# Altium PCB SolarNode.PcbDoc (part 1 of 2)
Units mil, origin at the board's own origin, x right, y up, seen from the top; angles counter-clockwise.
Board outline 7250 x 4975 mil, 2 copper layers (Top Layer, Bottom Layer); 206 components, 187 nets, 727 pads, 156 vias.
Unrouted connection lines stored in the file: 1.
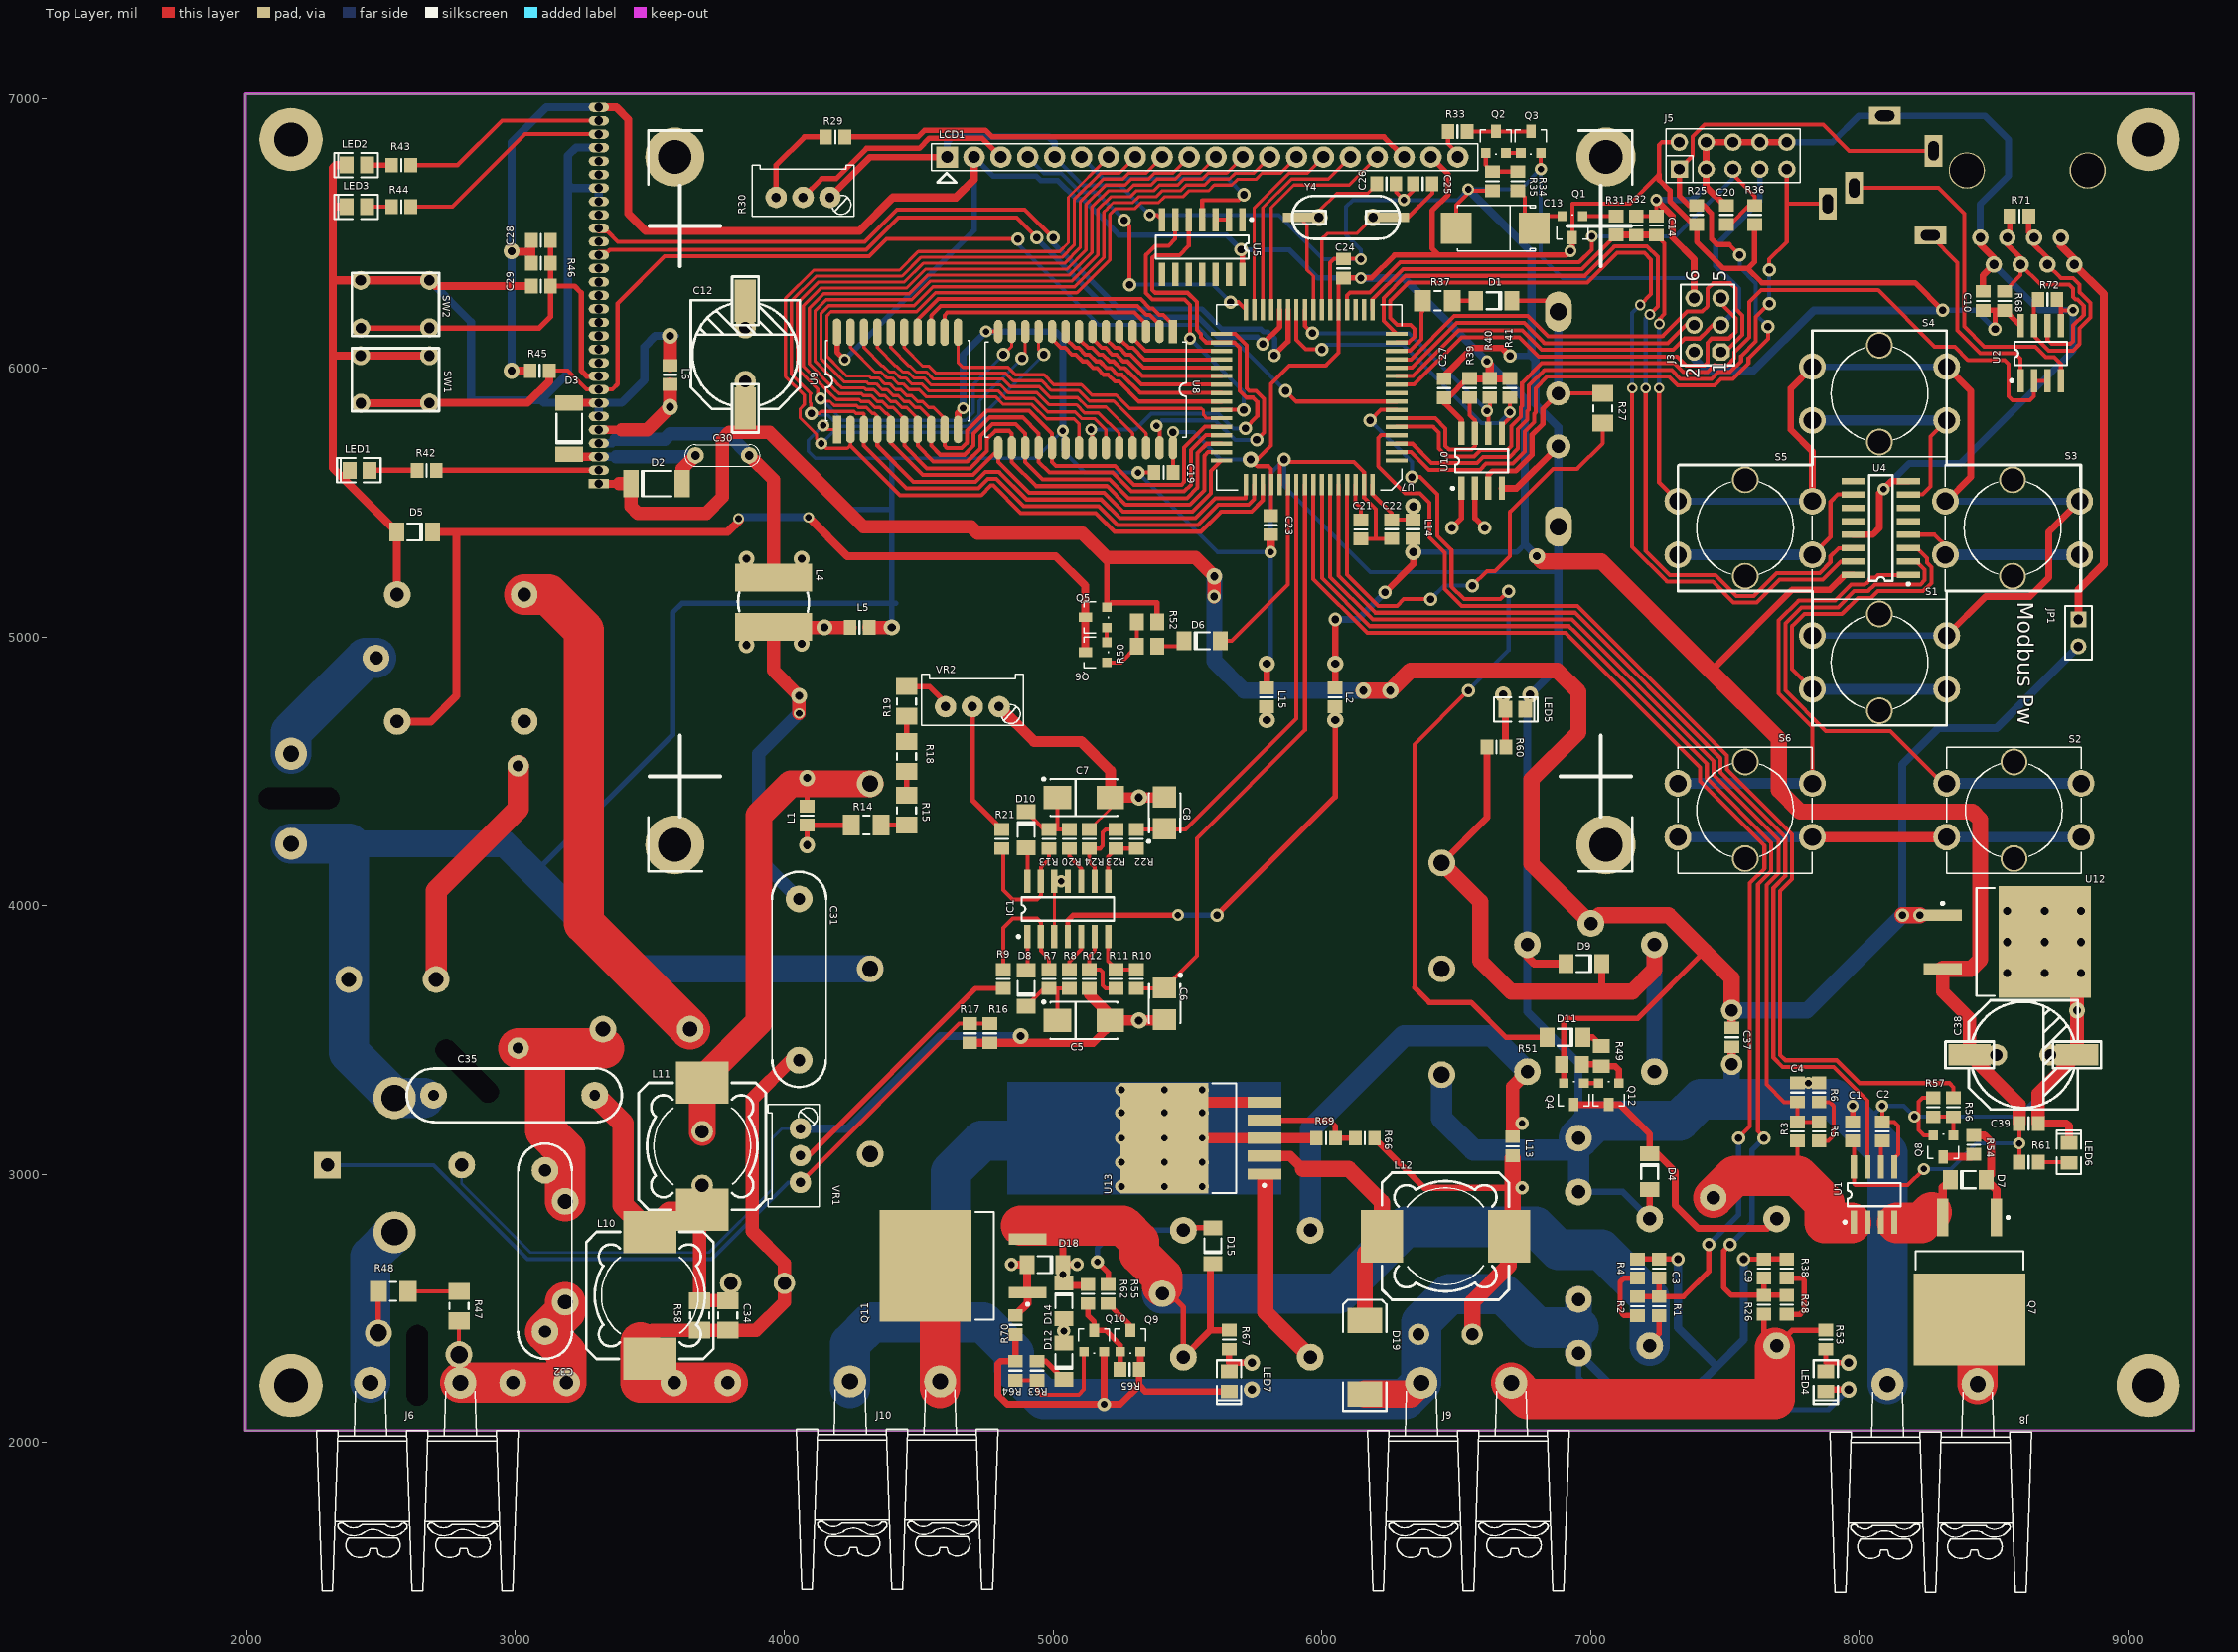
[diagram p0: Top Layer view]
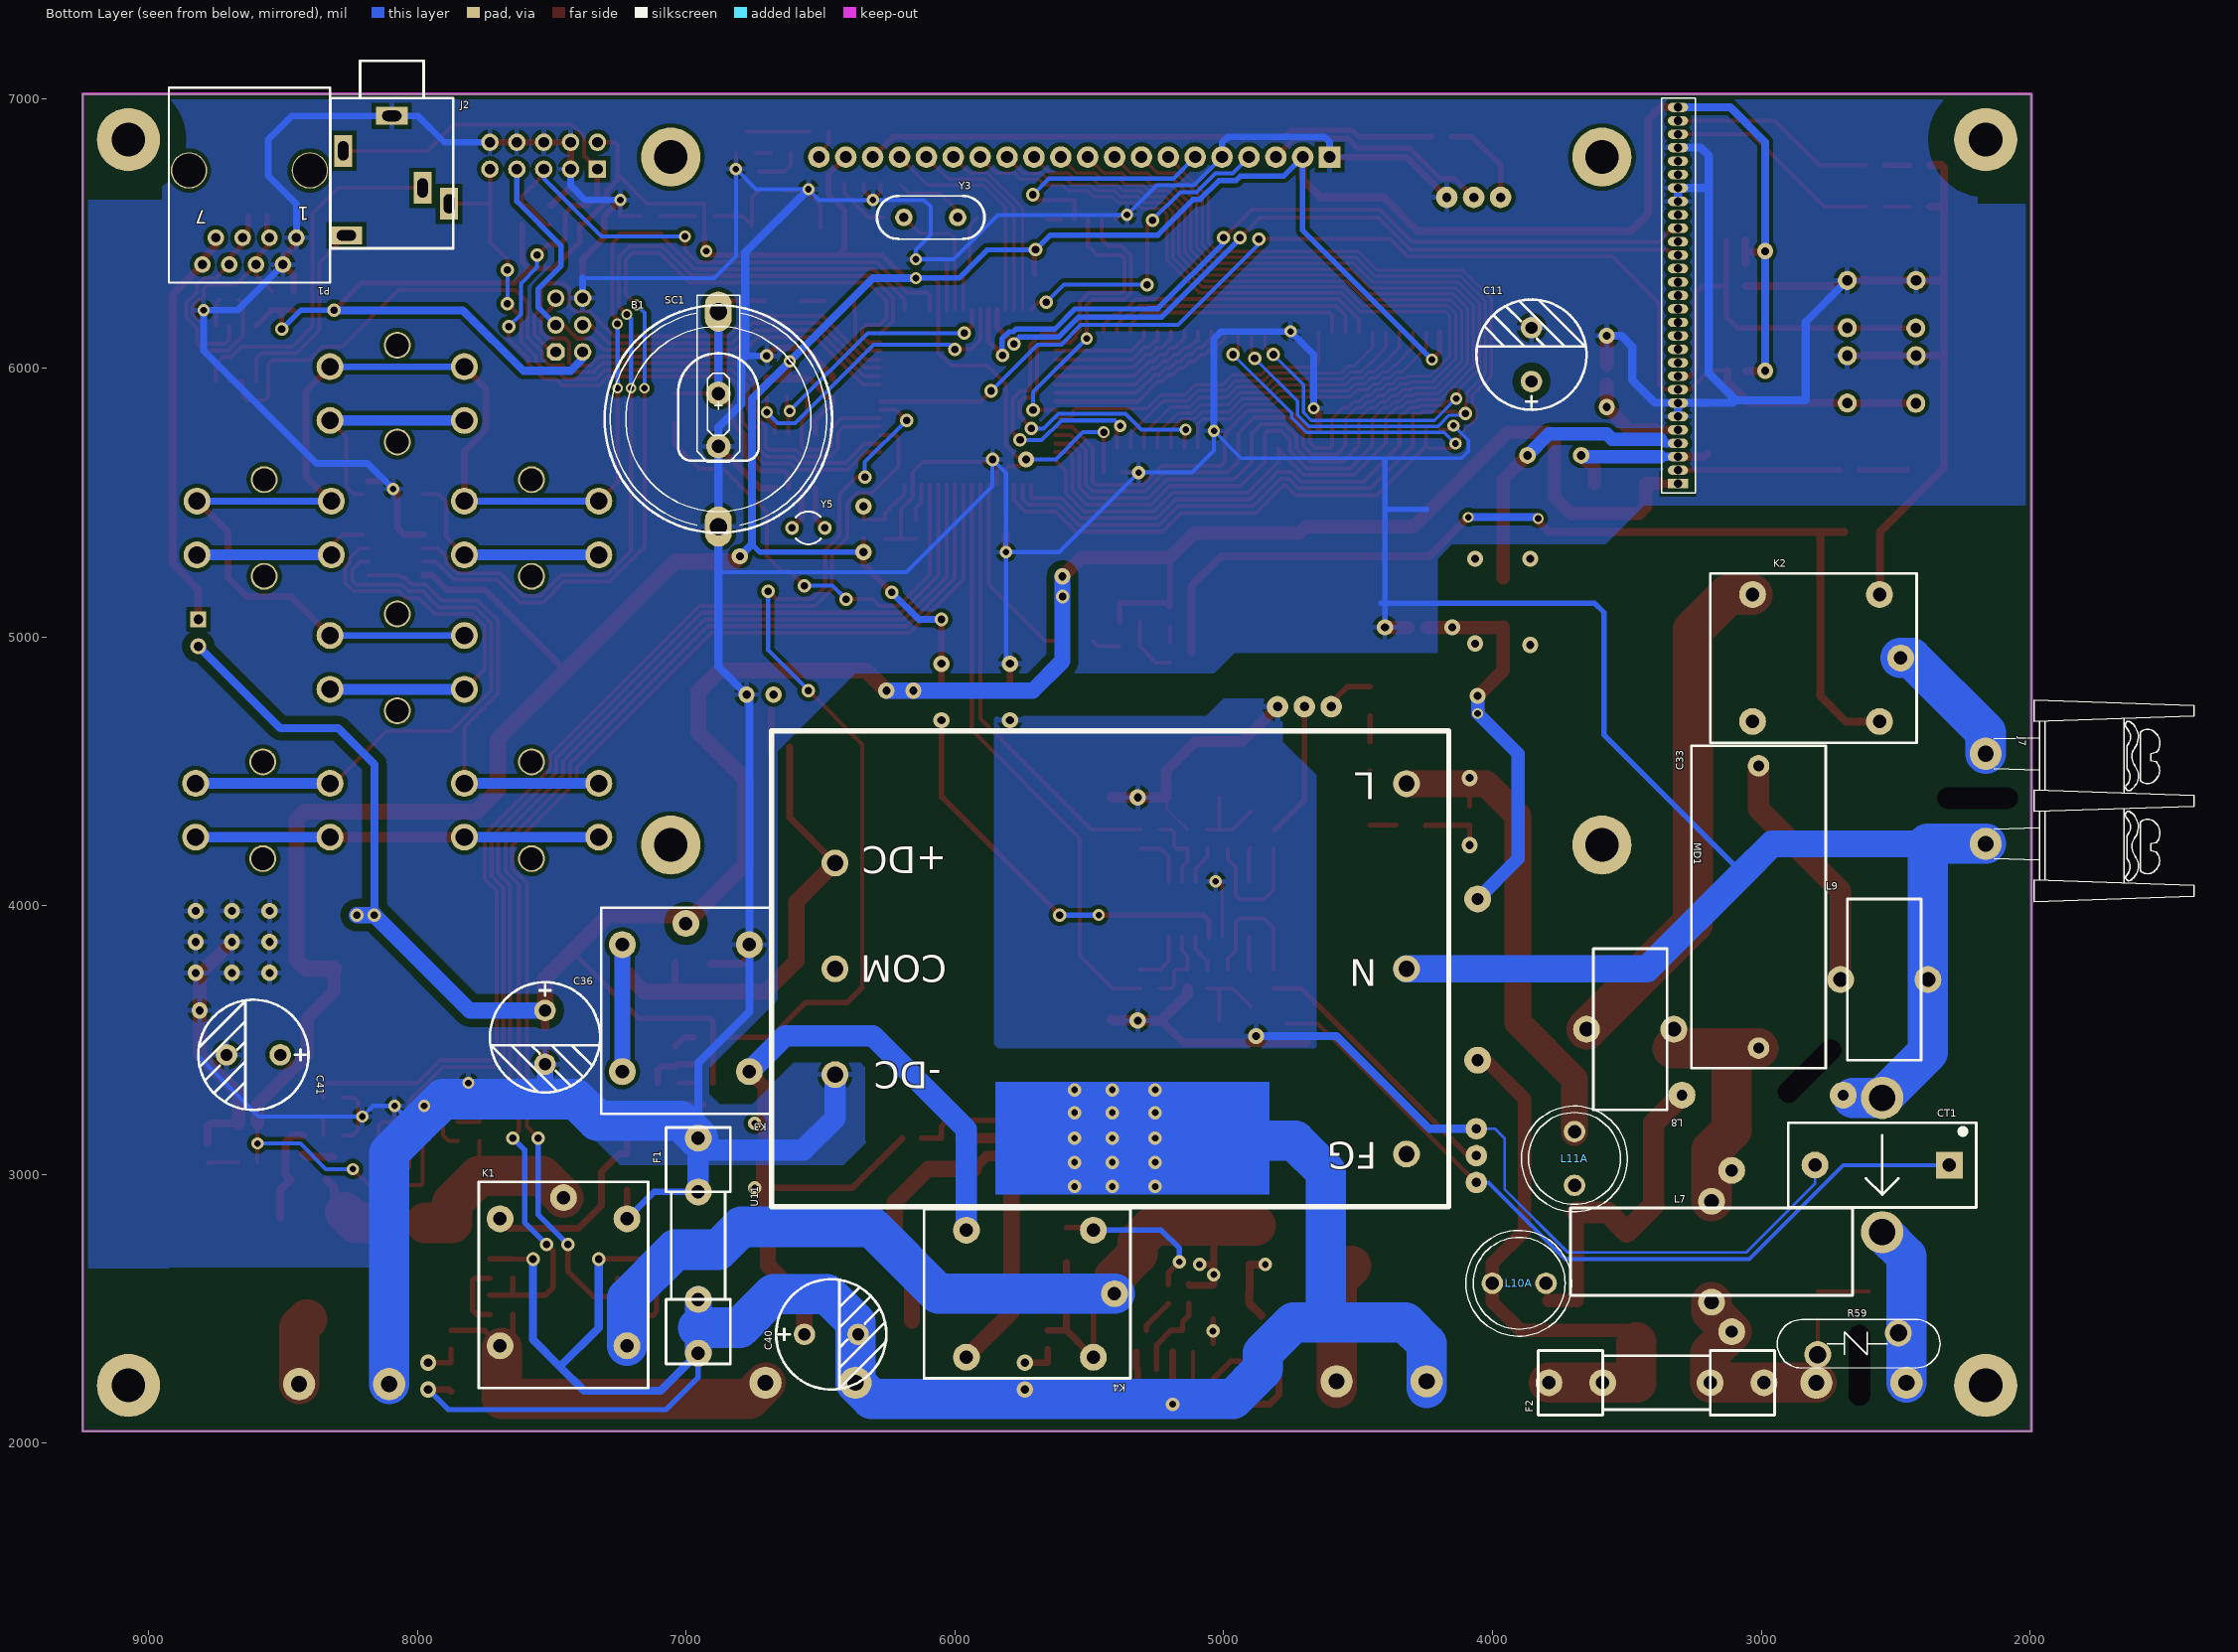
[diagram p1: Bottom Layer view, seen from below]

## Layer stack, top to bottom
Top Layer: signal copper 1.4
Dielectric: dielectric 12.6, FR-4, Dk 4.8
Bottom Layer: signal copper 1.4

## Board outline
1995,2045 9245,2045 9245,7020 1995,7020

## Design rules (kind name [scope] priority, off if disabled: settings)
Clearance padfree [InPolygon vs InNet('No Net') and IsPad] p1: gap=30
Clearance Pad-Pad [IsPad vs IsPad] p2: gap=1
Clearance "poly - net VA" [InNet('VA') vs InNet('GND')] p3: gap=30
Clearance "Poly - All" [InPolygon] p4: gap=15
Clearance Pad-Track [IsTrack vs IsPad] p5: gap=10
Clearance Genaral [All] p6: gap=10
ComponentClearance [All] p1 off: gap=10 collisioncheckmode=3 verticalgap=10 showdistances=FALSE
HoleSize [All] p1: absolutevalues=TRUE maxlimit=500 minlimit=1 maxpercent=80.000 minpercent=20.000
PolygonConnect [All] p1: connectstyle=Relief reliefconductorwidth=20 reliefentries=4 polygonreliefangle="90 Angle"
RoutingVias [All] p1: holewidth=25 width=40 viastyle="Through Hole" minholewidth=10 minwidth=30 maxholewidth=100 maxwidth=150
SilkscreenOverComponentPads [All] p1: minsilkscreentomaskgap=10
SolderMaskExpansion [All] p1: expansion=4
Width [All] p1: maxlimit=1000 minlimit=10 preferedwidth=15
25 further rules are at their usual default settings.

## Classes and differential pairs
component class U_PLmodule: C28 C29 C30 C31 D2 D3 L4 L5 L6 LED1 LED2 LED3 MD1 R42 R43 R44 R45 R46 R47 R48 SW1 SW2
component class U_ACmonitor: C1 C2 C3 C4 C5 C6 C7 C8 C9 CT1 D8 D10 IC1 J6 L1 L2 L15 R1 R2 R3 R4 R5 R6 R7 R8 R9 R10 R11 R12 R13 R14 R15 R16 R17 R18 R19 R20 R21 R22 R23 R24 R26 R28 R38 R59 U1 VR1 VR2
component class U_PSU: C11 C12 C32 C33 C34 C35 C36 C37 C38 C39 C40 C41 D9 D12 D14 D15 D18 D19 F2 J10 K3 K4 L7 L8 L9 L10 L10A L11 L11A L12 L13 LED5 LED6 LED7 Q9 Q10 Q11 R55 R58 R60 R61 R62 R63 R64 R65 R66 R67 R69 R70 U11 U12 U13
component class U_HUD: C13 C14 LCD1 Q1 Q2 Q3 R29 R30 R31 R32 R33 R34 R35 S1 S2 S3 S4 S5 S6 U4
component class U_Actuator: D4 D5 D6 D7 D11 F1 J7 J8 J9 K1 K2 LED4 Q4 Q5 Q6 Q7 Q8 Q12 R49 R50 R51 R52 R53 R54 R56 R57
component class U_Mcu: B1 C10 C19 C20 C21 C22 C23 C24 C25 C26 C27 D1 J2 J3 J5 JP1 L14 P1 R25 R27 R36 R37 R39 R40 R41 R68 R71 R72 SC1 U2 U5 U7 U8 U9 U10 Y3 Y4 Y5

## Components (designator, comment, footprint, x,y, rotation, side; value= is the part's Value field where it differs from the comment)
B1 "+3V" pincucao 6880,6210.36 r180 bottom
C1 "104" 6-0805_N 7975,3160 r90 top
C2 "102" 6-0805_N 8085,3160 r90 top
C3 "104" 6-0805_N 7255,2650 r90 top
C4 "104" 6-0805_N 7770,3305 r90 top
C5 "100u16V" TC6032-2412 5115,3572.64 r0 top
C6 "1u16V" TC3528-1411 5415,3635 r270 top
C7 "100u16V" TC6032-2412 5115,4402.64 r0 top
C8 "1u16V" TC3528-1411 5415,4345 r90 top
C9 "104" 6-0805_N 7645,2650 r90 top
C10 "104" 6-0805_N 8460,6250 r90 top
C11 "1000u25V" CAP40x20 3855,5950 r90 bottom (schematic designator C40)
C12 "330uF/35v" EEE-G 3855,6050 r270 top (schematic designator C38)
C13 "107" SMC_D/WA 6790,6520.36 r180 top
C14 "CAP" 6-0805_N 7245,6529.92 r90 top
C19 "104" 6-0805_N 5411.42,5611.25 r180 top
C20 "104" 6-0805_N 7505,6570 r90 top
C21 "104" 6-0805_N 6145,5400 r270 top
C22 "104" 6-0805_N 6260,5400.36 r90 top
C23 "104" 6-0805_N 5810,5415.36 r270 top
C24 "104" 6-0805_N 6080,6370.36 r90 top
C25 "22p" 6-0805_N 6375.43,6685.36 r0 top
C26 "22p" 6-0805_N 6240.43,6685.36 r180 top
C27 "104" 6-0805_N 6455,5925 r90 top
C28 "68p" 6-0805_N 3095,6475 r180 top
C29 "68p" 6-0805_N 3095,6305 r180 top
C30 "1uF metalized polyester" CSIP3 3670,5675 r0 top
C31 "0.033uF/300VAC" 100n400v#1 4055,3425 r90 top
C32 "0.1uF/300VAC" 100n400v#1 3110,3015 r270 top
C33 "1uF/300VAC" CAP1.2/0.5 3010,3470 r90 bottom
C34 "15nF" 3216[1206] 3790,2475 r90 top
C35 "470nF/300VAC" 100n400v#2 2695,3295 r0 top
C36 "1000u25V" CAP40x20 7525,3610 r270 bottom
C37 "104" 6-0805_N 7525,3510 r270 top
C38 "330uF/35v" EEE-G 8610,3445 r180 top
C39 "104" 6-0805_N 8630,3190 r0 top
C40 "1000u25V" CAP40x20 6560,2405 r180 bottom
C41 "1000u25V" CAP40x20 8510,3445 r0 bottom (schematic designator C40)
CT1 "AX0500" CT-NHO 2300,3035 r0 bottom
D1 "1N4148" SOD-80/MLL34 6640,6250.36 r0 top
D2 "FR207" MELF-D5022-2009 3525,5570 r180 top
D3 "FR207" MELF-D5022-2009 3200,5775 r270 top
D4 "1N4148" SOD-80/MLL34 7220,3010 r90 top
D5 "1N4148" SOD-80/MLL34 2625,5390 r0 top
D6 "Z9V" SOD-80/MLL34 5555,4985 r180 top
D7 "Z12V" SOD-80/MLL34 8405,2980 r180 top
D8 "1N4148" SOD-80/MLL34 4900,3692.64 r270 top
D9 "1N4148" SOD-80/MLL34 6975,3785 r0 top
D10 "1N4148" SOD-80/MLL34 4900,4282.64 r90 top
D11 "Z9V" SOD-80/MLL34 6905,3510 r0 top
D12 "1N4148" SOD-80/MLL34 5040,2305 r270 top
D14 "Z15V" SOD-80/MLL34 5040,2530 r90 top
D15 "1N4148" SOD-80/MLL34 5595,2735 r270 top
D18 "Z12V" SOD-80/MLL34 4970,2665 r0 top
D19 "SS24/34" DSO-C2/X3.3 6160,2320 r90 top
F1 "FUSE 15A" FUSE2 6955,2935 r270 bottom
F2 "FUSE 5A" FUSE2 3190,2225 r0 bottom
IC1 "LM324" SO14 5055,3987.64 r0 top
J2 "COM_PORT1_TTL" SJ-3515 8095,7005 r180 bottom
J3 "SPI EX" HDR2X3 7485,6060 r90 top
J5 "HEADER 5X2" IDC10 7330,6740 r0 top
J6 "220 VAC IN" JACKCAUDAU2 2460,2225 r0 top
J7 "600W AC/DC MODULE" JACKCAUDAU2 2165,4565 r270 bottom
J8 "95-150W 12/24VDC LED LAMP" JACKCAUDAU2 8440,2220 r180 top
J9 "600W VIN" JACKCAUDAU2 6370,2225 r0 top
J10 "JP2" JACKCAUDAU2 4245,2230 r0 top
JP1 "Modbus Pw" HDR1X2 8815,5065 r270 top
K1 "12V 10A" RELAYVUONG 7220,2835 r0 bottom
K2 "12V 10A" RELAYVUONG 2560,4685 r90 bottom
K3 "12V 10A" RELAYVUONG 6765,3855 r0 bottom
K4 "12V 10A" RELAYVUONG 5485,2320 r90 bottom
L1 "Choke" 6-0805_N 4085,4335 r270 top
L2 "Choke" 6-0805_N 6050,4775 r90 top
L4 "39uH" 6D28 3960,5220 r0 top
L5 "1mH" 6-0805_N 4280,5035 r0 top
L6 "680uH" 6-0805_N 3575,5975 r90 top
L7 "Inductor" IND26x8 3185,2525 r0 bottom
L8 "Inductor" IND15X7 3325,3540 r270 bottom
L9 "Inductor" IND15x7 2705,3725 r90 bottom
L10 "100uH 1A" IND1207 3500,2550 r180 top
L10A "100uH 1A" CAMTRONDUNG 4000,2595 r180 bottom
L11 "100uH 1A" IND1207 3695,3105 r180 top
L11A "100uH 1A" CAMTRONDUNG 3695,2960 r90 bottom
L12 "330uH" IND1207 6460,2770 r90 top
L13 "10uH" 6-0805_N 6710,3105 r90 top
L14 "10uH" 6-0805_N 6340,5400.36 r90 top
L15 "Choke" 6-0805_N 5795,4775 r90 top
LCD1 "ST7920" LCD12864B 5325,5505.36 r180 top
LED1 "TXON_LED" "SMD _LED" 2420,5620 r0 top
LED2 "PKD_LED" "SMD _LED" 2410,6755 r0 top
LED3 "BIU_LED" "SMD _LED" 2410,6600 r0 top
LED4 "VMAIN LED" "SMD _LED" 7875,2230 r90 top
LED5 "LED_MDL" "SMD _LED" 6720,4730 r180 top
LED6 "LED_PW" "SMD _LED" 8780,3080 r270 top
LED7 "LED_BAT" "SMD _LED" 5655,2230 r90 top
MD1 "PL3120 Module" ECHELONMODULE 3310,5570 r270 bottom
P1 "MODBUS" BU_TEL8H_AMP 8625,6385 r0 bottom
Q1 "2N3904" SOT-23 6970,6565.36 r180 top
Q2 "2N3904" SOT-23 6610,6800.36 r0 top
Q3 "2N3904" SOT-23 6740,6800.36 r0 top
Q4 "2N3906" SOT-23 6975,3340 r180 top
Q5 "2N3906" SOT-23 5200,5035 r90 top
Q6 "2N3906" SOT-23 5200,4905 r90 top
Q7 "MOSFET-P" TO254P1420-3_4M 8410,2600 r270 top
Q8 "2N2222" SOT-23 8350,3145 r180 top
Q9 "2N2222" SOT-23 5250,2340 r0 top
Q10 "2N2222" SOT-23 5115,2340 r0 top
Q11 "MOSFET-P" TO254P1420-3_4M 4665,2660 r180 top
Q12 "2N3906" SOT-23 7105,3340 r180 top
R1 "150k" 6-0805_N 7255,2510 r90 top
R2 "12k" 6-0805_N 7175,2510 r270 top
R3 "150k" 6-0805_N 7770,3160 r90 top
R4 "18k" 6-0805_N 7175,2650 r90 top
R5 "12k" 6-0805_N 7850,3160 r270 top
R6 "18k" 6-0805_N 7850,3305 r90 top
R7 "10k" 6-0805_N 4985,3727.64 r90 top
R8 "10k" 6-0805_N 5060,3727.64 r270 top
R9 "10k" 6-0805_N 4815,3727.64 r270 top
R10 "10k" 6-0805_N 5310,3727.64 r90 top
R11 "33k" 6-0805_N 5235,3727.64 r270 top
R12 "10k" 6-0805_N 5135,3727.64 r270 top
R13 "10k" 6-0805_N 4985,4247.64 r270 top
R14 "220k" 3216[1206] 4305,4300 r180 top
R15 "220k" 3216[1206] 4455,4355 r90 top
R16 "100R" 6-0805_N 4765,3525 r90 top
R17 "100R" 6-0805_N 4690,3525 r90 top
R18 "220k" 3216[1206] 4455,4555 r270 top
R19 "220k" 3216[1206] 4455,4760 r90 top
R20 "10k" 6-0805_N 5060,4247.64 r90 top
R21 "10k" 6-0805_N 4810,4247.64 r90 top
R22 "10k" 6-0805_N 5310,4247.64 r270 top
R23 "33k" 6-0805_N 5235,4247.64 r90 top
R24 "10k" 6-0805_N 5135,4247.64 r90 top
R25 "470" 6-0805_N 7395,6570 r90 top
R26 "150k" 6-0805_N 7645,2515 r90 top
R27 "10K" 3216[1206] 7045,5850 r90 top
R28 "12k" 6-0805_N 7730,2515 r270 top
R29 "1K" 6-0805_N 4190,6860 r0 top
R30 "10K" BTXANH 4170,6635 r180 top
R31 "2K2" 6-0805_N 7095,6530.36 r90 top
R32 "1K8" 6-0805_N 7170,6529.92 r270 top
R33 "1R0" 6-0805_N 6505,6880.36 r180 top
R34 "47K" 6-0805_N 6730,6695.36 r270 top
R35 "10K" 6-0805_N 6635,6695.36 r90 top
R36 "100k" 6-0805_N 7610,6570 r270 top
R37 "10K" 3216[1206] 6430,6250.36 r0 top
R38 "18k" 6-0805_N 7730,2650 r90 top
R39 "1K" 6-0805_N 6550,5925.36 r90 top
R40 "1K" 6-0805_N 6625,5925.36 r90 top
R41 "1K" 6-0805_N 6700,5925.36 r90 top
R42 "1k" 6-0805_N 2670,5620 r180 top
R43 "1k" 6-0805_N 2575,6755 r180 top
R44 "1k" 6-0805_N 2575,6600 r180 top
R45 "1k" 6-0805_N 3090,5990 r0 top
R46 "1k" 6-0805_N 3095,6390 r0 top
R47 "560K 1/4W" 3216[1206] 2790,2510 r270 top
R48 "560K 1/4W" 3216[1206] 2545,2565 r0 top
R49 "2k2" 2012[0805] 7040,3440 r270 top
R50 "2k2" 2012[0805] 5350,4965 r180 top
R51 "2k2" 2012[0805] 6930,3410 r180 top
R52 "2k2" 2012[0805] 5350,5055 r0 top
R53 "2K" 6-0805_N 7875,2385 r90 top
R54 "1K" 6-0805_N 8425,3110 r90 top
R55 "10" 6-0805_N 5205,2555 r90 top (schematic designator R67)
R56 "1K" 6-0805_N 8350,3250 r270 top
R57 "10K" 6-0805_N 8275,3250 r270 top
R58 "330" 3216[1206] 3685,2475 r270 top
R59 "MOV 14D471" MOV471 2790,2330 r180 bottom
R60 "2K" 6-0805_N 6650,4590 r180 top
R61 "2K" 6-0805_N 8630,3045 r180 top
R62 "10K" 6-0805_N 5130,2555 r90 top
R63 "1K" 6-0805_N 4940,2270 r90 top
R64 "10K" 6-0805_N 4860,2270 r270 top
R65 "10K" 6-0805_N 5285,2275 r180 top
R66 "5K6" 6-0805_N 6160.43,3135 r0 top
R67 "2K" 6-0805_N 5655,2385 r90 top
R68 "1K" 6-0805_N 8540,6250 r90 top
R69 "1K8" 6-0805_N 6015.43,3135 r180 top
R70 "1K" 6-0805_N 4860,2440 r90 top
R71 "300" 6-0805_N 8595,6565 r0 top
R72 "1K" 6-0805_N 8700,6255 r0 top
S1 "SW-PB" CTCHIP_TO 7825,4805 r90 top
S2 "SW-PB" CTCHIP_TO 8825,4455 r270 top
S3 "SW-PB" CTCHIP_TO 8320,5305 r90 top
S4 "SW-PB" CTCHIP_TO 7825,5805 r90 top
S5 "SW-PB" CTCHIP_TO 7325,5305 r90 top
S6 "SW-PB" CTCHIP_TO 7825,4455 r270 top
SC1 "1F 5.5V" SUPERCAP 6880,5905.36 r270 bottom
SW1 "SERVICE" SW-4P-S 2680,5870 r180 top
SW2 "RESET" SW-4P-S 2680,6150 r180 top
U1 "ACS712" SO8 8055,2925 r0 top
U2 "DS75176BN(8)" SO8 8675,6055 r0 top
U4 "4017" SO16 8080,5405 r90 top
U5 "74HC02" SO14 5555,6450 r180 top
U7 "ATmega128" QFP64-3 6278.42,5656.25 r180 top
U8 "CY62256" SO28X 5446.42,6136.25 r270 top
U9 "74HC573" SO20W 4196.42,5771.25 r90 top
U10 "DS1307" SO8 6595,5655.36 r0 top
U11 "ATC-12S" "ATC MODULE" 4320,3765 r0 bottom
U12 "78M05" TO254P1420-3_4M 8550,3865 r0 top
U13 "LM2576" TO170P1420-6N 5550,3135 r180 top
VR1 "10k" BTXANH 4060,3170 r270 top
VR2 "1K" BTXANH 4800,4740 r180 top
Y3 "14.7456MHz" XTAL 6190,6560.36 r180 bottom
Y4 "14.7456MHz" XTAL-SMD 6265,6560.36 r180 top
Y5 "32,768k" R38 6545,5405.36 r270 bottom

## Footprints (in the part's own frame and the unit in brackets; to place one, negate y for a bottom-side part, rotate by r counter-clockwise, add the part's x,y. Pads: shape width x height; smd on the part's side, far side on the other; paste and mask are expansions set on the pad)
6-0805_N [mm] "Chip Resistor, Body 2.0x1.2mm, IPC Medium Density"
  rect 1.2x1.4 smd: 1(-0.9,0) 2(0.9,0)
  silkscreen extent 0,-0.6 0,0.6, body extent -1.07,-0.7 1.07,0.7, height 0.7
6D28 [mm] "inductor 6D28"
  rect 7.3x2.65 smd: 1(0,0) 2(0,-4.65)
  silkscreen extent -3.35,-3.19 3.35,-1.38
100n400v#1 [mil]
  round 100 hole 45: 1(0,0) 2(600,0)
  silkscreen extent -99,-101 700,101
100n400v#2 [mil]
  round 100 hole 40: 1(0,0) 2(600,0)
  silkscreen extent -99,-101 700,101
2012[0805] [mm] "Metal Electrode Face (MELF) Resistor; Body 2 x 1.4 mm (LxDia)"
  rect 1.3x1.6 smd: 1(-0.95,0) 2(0.95,0)
3216[1206] [mm] "Metal Electrode Face (MELF) Resistor; Body 3.2 x 1.8 mm (LxDia)"
  rect 1.6x2 smd: 1(-1.4,0) 2(1.4,0)
  silkscreen extent -0.3,-0.9 0.3,0.9
"ATC MODULE" [mm] "AC - DC convert module"
  round 2.54 hole 1.524: 1(0,17.5) 2(0,0) 3(0,-17.5) 4(54,10) 5(54,0) 6(54,-10)
  silkscreen extent -4,-22.5 60,22.5
BTXANH [mil]
  round 80 hole 35: 1(0,0) 2(100,0) 3(200,0)
  silkscreen extent -90,-120 290,70
BU_TEL8H_AMP [mil]
  round 62 hole 35: 1(-175,-100) 2(-125,0) 3(-75,-100) 4(-25,0) 5(25,-100) 6(75,0) 7(125,-100) 8(175,0)
  round 135 hole 125: BO1(-225,-350) BO2(225,-350)
  silkscreen extent -300,-658 300,67
CAMTRONDUNG [mil]
  round 80 hole 50: 1(-0.63,0) 2(199.37,0)
  silkscreen extent -99,-197 294,197
CAP1.2/0.5 [mil]
  round 80 hole 40: 1(0,0) 2(1050,0)
  silkscreen extent -75,-250 1125,250
CAP40x20 [mil]
  round 80 hole 45: 1(0,0) 2(200,0)
  silkscreen extent -105,-205 305,205
CSIP3 [mil]
  round 62 hole 32: 1(0,0) 2(200,0)
  silkscreen extent -40,-40 240,40
CT-NHO [mm]
  rect 2.54x2.54 hole 1.27: 1(0,0)
  round 4 hole 2.5: 2(6.35,-6.35) 4(6.35,6.35)
  round 2.54 hole 1.27: 3(12.7,0)
  silkscreen extent -2.54,-4 15.24,4
CTCHIP_TO [mil]
  round 100 hole 85: 0(-80,-250) 0(280,-250)
  round 100 hole 65: 1(0,0) 1(0,-500) 2(200,0) 2(200,-500)
  silkscreen extent -135,-500 335,0
DSO-C2/X3.3 [mm] "DO-214-AB/SMC; 2 C-Bend Leads; Body 7.9 x 5.9 mm, inc. leads (LxW)"
  rect 2.4x3.3 smd: 1(-3.475,0) 2(3.475,0)
  silkscreen extent -5.07,-2.05 5.43,2.05
ECHELONMODULE [mil]
  rect 35x75 hole 32: 1(0,0)
  oval 35x75 hole 32: 2(-50,0) 3(-100,0) 4(-150,0) 5(-200,0) 6(-250,0) 7(-300,0) 8(-350,0) 9(-400,0) 10(-450,0) 11(-500,0) 12(-550,0) 13(-600,0) 14(-650,0) 15(-700,0) 16(-750,0) 17(-800,0) 18(-850,0) 19(-900,0) 20(-950,0) 21(-1000,0) 22(-1050,0) 23(-1100,0) 24(-1150,0) 25(-1200,0) 26(-1250,0) 27(-1300,0) 28(-1350,0) 29(-1400,0)
  silkscreen extent -1435,-60 35,65
EEE-G [mm] "aluminum Electrolytic Capacitor 10mm X 10mm"
  rect 4x2 smd: 1(5.08,0) 2(-5.08,0)
  silkscreen extent -7.37,-5.15 7.37,5.15
FUSE2 [mil]
  round 100 hole 50: 1(-200,0) 1(0,0) 2(400,0) 2(600,0)
  silkscreen extent -240,-120 640,120
HDR1X2 [mm] "Connector; Header; 2 Position"
  rect 1.5x1.5 hole 0.9: 1(0,0)
  round 1.5 hole 0.9: 2(2.54,0)
  silkscreen extent -1.27,-1.27 3.81,1.27
HDR2X3 [mil] "Connector; Header; 3x2 Position"
  oct 65x65 hole 40: 1(0,0)
  round 65 hole 40: 2(0,100) 3(100,0) 4(100,100) 5(200,0) 6(200,100)
  silkscreen extent -50,-50 250,150
IDC10 [mil]
  rect 65x65 hole 40: 1(0,0)
  round 65 hole 40: 2(0,100) 3(100,0) 4(100,100) 5(200,0) 6(200,100) 7(300,0) 8(300,100) 9(400,0) 10(400,100)
  silkscreen extent -50,-50 450,150
IND15X7 [mil]
  round 100 hole 55: 1(0,0) 2(0,-325)
  silkscreen extent -300,-300 300,-25
IND15x7 [mil]
  round 100 hole 55: 1(0,0) 2(0,-325)
  silkscreen extent -300,-300 300,-25
IND26x8 [mil]
  round 100 hole 55: 1(0,0) 2(0,-375)
  silkscreen extent -525,-350 525,-25
IND1207 [mm] "inductor 1207"
  rect 5x4 smd: 1(0,6) 2(0,-6)
  silkscreen extent -6,-6 6,6
JACKCAUDAU2 [mil]
  round 120 hole 60: 1(0,0) 2(335,0)
  silkscreen extent -200,-775 550,-30
LCD12864B [mil] "LCD 128x64"
  round 220 hole 125: 0(-1732.28,1279.53) 0(-1732.28,-1279.53) 0(1732.28,1279.53) 0(1732.28,-1279.53)
  rect 80x80 hole 45: 1(718.98,-1279.53)
  round 80 hole 45: 2(618.9,-1279.53) 3(518.9,-1279.53) 4(418.9,-1279.53) 5(318.9,-1279.53) 6(218.9,-1279.53) 7(118.9,-1279.53) 8(18.9,-1279.53) 9(-81.1,-1279.53) 10(-181.1,-1279.53) 11(-281.1,-1279.53) 12(-381.1,-1279.53) 13(-481.1,-1279.53) 14(-581.1,-1279.53) 15(-681.1,-1279.53) 16(-781.1,-1279.53) 17(-881.1,-1279.53) 18(-981.1,-1279.53) 19(-1081.1,-1279.53) 20(-1181.1,-1279.53)
  silkscreen extent -1831,-1378 1831,1378
MELF-D5022-2009 [mm] "Metal Electrode Face (MELF) Diode; Body 5 x 2.5 mm (LxDia)"
  rect 1.45x2.6 smd: 1(-2.425,0) 2(2.425,0)
  silkscreen extent -1.4,-1.2 1.4,1.2
MOV471 [mil]
  round 100 hole 65: 1(0,0) 2(300,80)
  silkscreen extent -150,-50 455,130
pincucao [mil]
  oval 100x150 hole 65: 1(0,0) 2(0,-800)
  silkscreen extent -403,-795 403,60
QFP64-3 [mil]
  rect 80x16 smd: 1(0,0) 2(0,-31) 3(0,-62) 4(0,-94) 5(0,-125) 6(0,-157) 7(0,-188) 8(0,-219) 9(0,-251) 10(0,-282) 11(0,-314) 12(0,-345) 13(0,-376) 14(0,-408) 15(0,-439) 16(0,-471) 33(652,-471) 34(652,-439) 35(652,-408) 36(652,-376) 37(652,-345) 38(652,-314) 39(652,-282) 40(652,-251) 41(652,-219) 42(652,-188) 43(652,-157) 44(652,-125) 45(652,-94) 46(652,-62) 47(652,-31) 48(652,0)
  rect 16x80 smd: 17(90,-561) 18(121,-561) 19(153,-561) 20(184,-561) 21(216,-561) 22(247,-561) 23(278,-561) 24(310,-561) 25(341,-561) 26(373,-561) 27(404,-561) 28(435,-561) 29(467,-561) 30(498,-561) 31(530,-561) 32(561,-561) 49(561,90) 50(530,90) 51(498,90) 52(467,90) 53(435,90) 54(404,90) 55(373,90) 56(341,90) 57(310,90) 58(278,90) 59(247,90) 60(216,90) 61(184,90) 62(153,90) 63(121,90) 64(90,90)
  silkscreen extent -20,-580 670,110
R38 [mm] "Crystal, Thru-Hole; 2 Leads; Body 3.1 x 8.2 mm (Dia.xH)"
  round 1.3 hole 0.7: 1(0,1.55) 2(0,-1.55)
  silkscreen extent -1.55,-1.19 1.55,1.17
RELAYVUONG [mm]
  round 2.54 hole 1.27: 1(6,-2) 2(0,12) 3(12,12) 4(12,0) 5(0,0)
  silkscreen extent -2,-3.5 14,16
SJ-3515 [mm] "3.5mm AUDIO JACK-STEREO"
  rect 3x1.7 hole 1 slot 1.8 at 0 deg: 1(0,-1.7) 5(-4.3,-13)
  rect 1.7x3 hole 1 slot 1.8 at 90 deg: 2(-4.6,-5) 3(2.9,-8.5) 4(5.4,-10)
  silkscreen extent -5.8,-14.21 5.8,3.5
SMC_D/WA [mil]
  rect 115x115 smd: 1(0,0) 2(290,0)
  silkscreen extent -5,-85 285,85
"SMD _LED" [mm]
  rect 1.3x1.6 smd: 1(0.95,0) 2(-0.95,0)
  silkscreen extent -2.13,-1.15 2,1.15
SO8 [mm] "Small Outline; 8 Leads; Body Width 3.9 mm; Pitch 1.27 mm"
  rect 0.6x2.2 smd: 1(-1.905,-2.6) 2(-0.635,-2.6) 3(0.635,-2.6) 4(1.905,-2.6) 5(1.905,2.6) 6(0.635,2.6) 7(-0.635,2.6) 8(-1.905,2.6)
  silkscreen extent -2.88,-2.72 2.5,1.1
SO14 [mm] "Small Outline; 14 Leads; Body Width 3.9 mm; Pitch 1.27 mm"
  rect 0.6x2.2 smd: 1(-3.81,-2.6) 2(-2.54,-2.6) 3(-1.27,-2.6) 4(0,-2.6) 5(1.27,-2.6) 6(2.54,-2.6) 7(3.81,-2.6) 8(3.81,2.6) 9(2.54,2.6) 10(1.27,2.6) 11(0,2.6) 12(-1.27,2.6) 13(-2.54,2.6) 14(-3.81,2.6)
  silkscreen extent -4.78,-2.72 4.38,1.1
SO16 [mm] "Small Outline; 16 Leads; Body Width 3.9 mm; Pitch 1.27 mm"
  rect 0.6x2.2 smd: 1(-4.445,-2.6) 2(-3.175,-2.6) 3(-1.905,-2.6) 4(-0.635,-2.6) 5(0.635,-2.6) 6(1.905,-2.6) 7(3.175,-2.6) 8(4.445,-2.6) 9(4.445,2.6) 10(3.175,2.6) 11(1.905,2.6) 12(0.635,2.6) 13(-0.635,2.6) 14(-1.905,2.6) 15(-3.175,2.6) 16(-4.445,2.6)
  silkscreen extent -5.42,-2.72 5,1.1
SO20W [mm]
  rect 2.6x0.8 smd: 1(0,0)
  oval 2.6x0.8 smd: 2(0,-1.27) 3(0,-2.54) 4(0,-3.81) 5(0,-5.08) 6(0,-6.35) 7(0,-7.62) 8(0,-8.89) 9(0,-10.16) 10(0,-11.43) 11(9.2,-11.43) 12(9.2,-10.16) 13(9.2,-8.89) 14(9.2,-7.62) 15(9.2,-6.35) 16(9.2,-5.08) 17(9.2,-3.81) 18(9.2,-2.54) 19(9.2,-1.27) 20(9.2,0)
  silkscreen extent 0.8,-12.51 8.4,1.09
SO28X [mm]
  rect 2.2x0.8 smd: 1(0,0)
  oval 2.2x0.8 smd: 2(0,-1.27) 3(0,-2.54) 4(0,-3.81) 5(0,-5.08) 6(0,-6.35) 7(0,-7.62) 8(0,-8.89) 9(0,-10.16) 10(0,-11.43) 11(0,-12.7) 12(0,-13.97) 13(0,-15.24) 14(0,-16.51) 15(11,-16.51) 16(11,-15.24) 17(11,-13.97) 18(11,-12.7) 19(11,-11.43) 20(11,-10.16) 21(11,-8.89) 22(11,-7.62) 23(11,-6.35) 24(11,-5.08) 25(11,-3.81) 26(11,-2.54) 27(11,-1.27) 28(11,0)
  silkscreen extent 0.99,-17.75 10.01,1.24
SOD-80/MLL34 [mm] "Metal Electrode Face (MELF) Diode; Body 3.5 x 1.7 mm (LxDia)"
  rect 1.4x1.8 smd: 1(-1.7,0) 2(1.7,0)
  silkscreen extent -0.7,-0.8 0.7,0.8
SOT-23 [mil]
  rect 36x36 smd: 1(0,0) 2(75,0)
  rect 36x50 smd: 3(38,80)
  silkscreen extent -20,-5 95,85
SUPERCAP [mil] "EECF5R5U155"
  round 90 hole 50: 1(0,0) 2(196.85,0)
  silkscreen extent -328,-423 518,423
SW-4P-S [mm]
  round 1.8 hole 1: 1(0,0) 2(0,-4.47) 3(6.502,-4.47) 4(6.477,0.025)
  silkscreen extent -0.91,-5.18 7.34,0.79, body extent -0.86,-5.23 7.35,0.76, height 9.52
TC3528-1411 [mm] "Capacitor, SM Tantalum; Body 3.5 x 2.8 mm (LxW typ)"
  rect 2x2.2 smd: 1(-1.5,0) 2(1.5,0)
  silkscreen extent -2.82,-1.5 1.85,1.63
TC6032-2412 [mm] "Capacitor, SM Tantalum; Body 6.0 x 3.2 mm (LxW typ)"
  rect 2.6x2.2 smd: 1(-2.5,0) 2(2.5,0)
  silkscreen extent -3.92,-1.75 3.15,1.87
TO170P1420-6N [mm] "D2-PAK, 6-Leads, Body 8.9x10.1mm, Pitch 1.7mm, Lead Span 14.2mm, IPC Medium Density"
  rect 3.2x1.05 smd: 1(-6,3.4) 2(-6,1.7) 3(-6,0) 4(-6,-1.7) 5(-6,-3.4)
  rect 8.3x10.45 smd: 6(3.45,0)
  silkscreen extent -6.13,-5.2 -1.1,5.2, body extent -3.35,-5.2 6.05,5.2, height 4.65
TO254P1420-3_4M [mm] "D2-PAK, 4-Leads, Body 9.2x10mm, Pitch 2.54mm, Lead Span 14.2mm, IPC Low Density"
  rect 3.6x1.1 smd: 1(-6.1,2.54) 3(-6.1,-2.54)
  rect 8.7x10.55 smd: 4(3.55,0)
  silkscreen extent -6.22,-5.1 -1.2,5.1, body extent -2.9,-5.13 6.45,5.13, height 4.57
XTAL [mil]
  round 65 hole 35: 1(0,0) 2(200,0)
  silkscreen extent -100,-80 300,80
XTAL-SMD [mil]
  rect 120x35 smd: 1(0,0) 2(350,0)
  silkscreen extent -25,-80 375,80

## Part data
B1 J6 J7 J8 J9: library part CON2, "Connector"
C1 C2 C3 C4 C9 C10 C13 C19 C21 C22 C23 C24 C27 C28 C29 C30 C31 C32 C33 C34 C35 C37 C39: library part CAP, "Capacitor"
C5 C6 C7 C8 C11 C36 C40 C41: library part "CAPACITOR POL", "Capacitor"
C12 C38 SC1: library part ELECTRO1, "Electrolytic Capacitor"
C14: "Capacitor"
C20: library part "Cap Pol1", "Polarized Capacitor (Radial)"
C25 C26: library part Cap, "Capacitor"
CT1: library part AX-0500
D1 D2 D3 LED1 LED2 LED3: library part DIODE
D4 D5 D8 D9 D10 D12 D15: library part "Diode 1N4007", "1 Amp General Purpose Rectifier"
D6 D7 D11 D14 D18: library part ZENER2, "Zener Diode"
D19: library part DIODE, "Hoangphat"
F1 F2: library part FUSE2, "Fuse"
IC1: "Op x 4"
J2: library part "Phonejack Stereo SW", "3-Conductor Jack with 2 break contacts (normals) and 2 auxiliary make contacts"
J3: library part "Header 3X2", "Header, 3-Pin, Dual row"
J10: library part Con2, "Connector 2"
JP1: library part "Header 2", "Header, 2-Pin"
K1 K2 K3 K4: library part Relay-SPDT, "G5LA-10A/250VAC / SRC-12VDC-SL-C"
L1 L2 L5 L10 L10A L11 L11A L14 L15: library part "INDUCTOR IRON"
L4 L6 L12 L13: library part INDUCTOR
LCD1: "ST7920 LCD128X64"
LED4 LED5 LED6 LED7: library part LED3, "Typical BLUE SiC LED"
MD1: library part CON29, "Connector"
P1: library part "Header 8", "Header, 8-Pin"
Q1 Q2 Q3 Q8 Q9 Q10: library part NPN1, "NPN Transistor"
Q4 Q5 Q6 Q12: library part PNP1, "PNP Transistor"
Q7 Q11: "P-Channel MOSFET"
R1 R2 R3 R4 R5 R6 R25 R26 R27 R28 R29 R33 R34 R35 R36 R37 R38 R39 R40 R41 R49 R50 R51 R52 R53 R54 R55 R56 R57 R58 R60 R61 R62 R63 R64 R65 R67 R68 R70 R71 R72: library part "Res Semi", "Semiconductor Resistor"
R7 R8 R9 R10 R11 R12 R13 R14 R15 R16 R17 R18 R19 R20 R21 R22 R23 R24: library part RES2
R30 VR1 VR2: library part RPot, "Potentiometer"
R31 R32 R42 R43 R44 R45 R46 R47 R48 R66 R69: library part RES1
R59: library part MOV
SW1 SW2: library part SW4-1, "Switch button 4 pin"
U2: "Multipoint RS-485/RS-422 Transceivers"
U5: library part 74LS02
U7: library part ATmega64-16AC, "8-Bit AVR Microcontroller with 64K Bytes of In-System Programmable Flash Memory"
U11: library part Component_1
U12: library part MC7805T
Y3 Y4: library part XTAL, "Crystal Oscillator"
Y5: library part CRYSTAL, "Crystal"

## Free pads (board coordinates)
  round 235 hole 125: 0(2165,2215) 0(2165,6850) 0(9075,2215) 0(9075,6850)
  round 10 hole 80 slot 300 at 0 deg: 0(2195,4400)
  round 10 hole 80 slot 300 at 90 deg: 0(2635,2290)
  round 10 hole 80 slot 300 at 135 deg: 0(2820,3385)
  round 365 on Top Overlay: 0(7575,5405) 0(8075,4905) 0(8075,5905) 0(8575,5405)

## Via types
v1: diameter 50, hole 28, Top Layer to Bottom Layer, 46 vias
v2: diameter 60, hole 30, Top Layer to Bottom Layer, 35 vias
v3: diameter 45, hole 25, Top Layer to Bottom Layer, 29 vias
v4: diameter 50, hole 25, Top Layer to Bottom Layer, 24 vias
v5: diameter 40, hole 25, Top Layer to Bottom Layer, 9 vias
v6: diameter 60, hole 32, Top Layer to Bottom Layer, 8 vias
v7: diameter 45, hole 24, Top Layer to Bottom Layer, 4 vias
v8: diameter 45, hole 28, Top Layer to Bottom Layer, 1 vias

## Nets (pads, with @x,y where several pads share a name; then routed paths per layer and width w, separated by ;. In a path a pad name is that pad's centre, name@x,y a point inside that pad or via, vN(x,y) a via of type N, cw(c..) or ccw(c..) an arc to the next point about the centre after c; other vN are vias at no path point)
12VDC_OUT: D9.2 K3.3 K3.4 R60.2 U11.6 | length 2325
  Top Layer w25: U11.6@6445.98,4158.7 6614.57,4327.28 R60.2@6614.57,4590 ; D9.2@7041.93,3785 7041.93,3683.07 7045,3680
  Top Layer w60: U11.6@6445.98,4158.7 6590,4014.69 6590,3795 6705,3680 7045,3680 7155,3680 7237.44,3762.44 K3.4@7237.44,3855
  Bottom Layer w60: K3.3@7237.44,3382.56 K3.4@7237.44,3855
+12: C40.1 L12.2 L13.1 R66.2 | length 1342.9
  Top Layer w25: R66.2@6195.87,3135 6380.87,2950 6710,2950 v4(6745,2950)
  Top Layer w60: C40.1@6560,2405 6560,2525 6696.22,2661.22 L12.2@6696.22,2770 6710,2783.78 6710,2950 L13.1@6710,3060
+LAMP_OUT: D7.2 Q7.3 U1.3 U1.4 | length 298.3
  Top Layer w30: Q7.3@8310,2840.16 8310,2951.93 D7.2@8338.07,2980
  Top Layer w150: U1.4@8140,2820 8230,2820 8270.16,2860.16
+VLAMP: K1.1 R3.1 U1.1 U1.2 | length 793.4
  Top Layer w15: 7770,2995 R3.1@7770,3124.57
  Top Layer w150: K1.1@7456.22,2913.74 7537.48,2995 7770,2995 7870,2895 7870,2820 U1.1@7970,2820
A: P1.3 P1.4 R68.2 R71.1 U2.6 | length 951.1
  Top Layer w15: R68.2@8540,6285.43 8600,6345.43 P1.4@8600,6385 8675,6310 8780,6310 8795,6295 8795,6265 8805,6255 8811.57,6255 8835,6231.57 8835,6198.43 8795,6158.43 8795,6100 8785,6090 8715,6090 8700,6105 U2.6@8700,6157.36
  Top Layer w20: R71.1@8559.57,6565 8559.57,6494.57 P1.3@8550,6485 8550,6460 8600,6410 P1.4@8600,6385
"AC SWITCHER": D6.1 U7.54 | length 711.1
  Top Layer w15: D6.1@5621.93,4985 5665,4985 5874.42,5194.42 U7.54@5874.42,5566.25
ADC_BAT_LAMP: C3.1 R1.2 R2.1 U7.57 | length 4513.3
  Top Layer w15: U7.57@5968.42,5566.25 5968.42,5215.16 6168.58,5015 6907.5,5015 7407.5,4515 7407.5,4462.5 7646.79,4223.21 7646.79,4138.21 7592.68,4084.1 7592.68,3177.68 v1(7550,3135)
  Top Layer w20: R2.1@7175,2545.43 R1.2@7255,2545.43 ; C3.1@7255,2614.57 R1.2@7255,2545.43 ; v1(7440,2740) 7440,2640 7345.43,2545.43 R1.2@7255,2545.43
  Bottom Layer w20: v1(7440,2740) 7550,2850 v1(7550,3135)
ADC_CELL: R27.1 U7.61 | length 1756.3
  Top Layer w15: U7.61@6094.42,5566.25 6094.42,5230.58 6210,5115 6280,5115 6305,5140 v1(6405,5140) ; v1(6560,5190) 6615,5245 6645,5245 6700,5300 6700,5465 6860,5625 6950,5625 7045,5720 R27.1@7045,5794.88
  Bottom Layer w15: v1(6405,5140) 6455,5190 v1(6560,5190)
ADC_IAC: C6.1 R10.1 U7.56 | length 2194.4
  Top Layer w15: R10.1@5310,3692.2 5413.15,3692.2 C6.1@5415,3694.06 5535,3814.06 5535,4250 5937.42,4652.42 U7.56@5937.42,5566.25
ADC_ILAMP: U1.7 U7.60 | length 3936.4
  Top Layer w15: U7.60@6062.42,5566.25 6062.42,5227.22 6199.64,5090 6941.07,5090 7482.5,4548.57 7482.5,4496.69 7724.29,4254.9 7724.29,4109.64 7680,4065.36 7680,3434.64 7714.64,3400 7905,3400 8030,3275 U1.7@8030,3027.36
ADC_MAIN: C9.1 R26.2 R28.1 U7.58 | length 4516
  Top Layer w15: U7.58@6000.42,5566.25 6000.42,5218.51 6178.93,5040 6920.36,5040 6940.18,5020.18 7432.5,4527.86 7432.5,4472.86 7671.79,4233.57 7671.79,4127.86 7622.68,4078.74 7622.68,3162.32 7645,3140 v1(7645,3135)
  Top Layer w20: v1(7520,2740) 7495,2715 7495,2580 7524.57,2550.43 R26.2@7645,2550.43 ; C9.1@7645,2614.57 R26.2@7645,2550.43 ; R28.1@7730,2550.43 R26.2@7645,2550.43
  Bottom Layer w20: v1(7520,2740) 7600,2820 7600,3090 v1(7645,3135)
ADC_VAC: C8.1 R22.1 U7.55 | length 1637.1
  Top Layer w15: R22.1@5310,4283.07 5493.07,4283.07 5905.42,4695.42 U7.55@5905.42,5566.25
ADC_VLAMP: C4.1 R3.2 R5.1 U7.59 | length 3671
  Top Layer w15: U7.59@6031.42,5566.25 6031.42,5222.87 6189.29,5065 6930.71,5065 7457.5,4538.21 7457.5,4486.33 7699.29,4244.54 7699.29,4120 7655,4075.71 7655,3335 7720.43,3269.57 C4.1@7770,3269.57 R3.2@7770,3195.43 R5.1@7850,3195.43
AGND: C5.2 C6.2 C7.2 C8.2 CT1.3 IC1.3 IC1.11 IC1.12 L15.1 R12.2 R16.1 R17.1 R24.2 VR1.1 VR2.1 | length 4801.1
  Top Layer w10: IC1.3@5005,3885.28 IC1.12@5005,4090 v7(5030,4090) IC1.11@5055,4090 ; R24.2@5135,4283.07 5213.43,4361.5 C7.2@5213.43,4402.64
  Top Layer w30: R17.1@4690,3489.57 R16.1@4765,3489.57 5149.29,3489.57 C5.2@5232.36,3572.64
  Top Layer w40: VR2.1@4800,4740 4930,4610 5105,4610 5213.43,4501.57 C7.2@5213.43,4402.64 5413.58,4402.64 C8.2@5415,4404.06 ; R12.2@5135,3692.2 5135,3670 5232.36,3572.64 5411.69,3572.64 C6.2@5415,3575.94
  Bottom Layer w10: CT1.3@2800,3035 2800,2965 3055,2710 3720,2710 3955,2945 3955,3135 3990,3170 VR1.1@4020,3170
  Bottom Layer w30: VR1.1@4060,3170 4235,3170 4580,3515 v2(4880,3515)
  other v2: 5320,3572.64 5320,4402.64 5795,4690
B: P1.5 P1.6 R71.2 R72.1 U2.7 | length 957.6
  Top Layer w15: R72.1@8664.57,6255 8650,6240.43 U2.7@8650,6157.36 8650,6119.64 8704.64,6065 8795.36,6065 8820,6089.64 8820,6148.08 8860,6188.08 8860,6241.92 8820,6281.92 8820,6310 8795,6335 8750,6335 P1.6@8700,6385
  Top Layer w20: R71.2@8630.43,6565 8630.43,6504.57 P1.5@8650,6485 8650,6460 8700,6410 P1.6@8700,6385
BACKLIGHT: C13.1 Q1.2 R34.2 | length 294.4
  Top Layer w15: R34.2@6730,6659.92 6755,6634.92 6755,6530.36 6790,6565.36 Q1.2@6895,6565.36
BAT_LAMP: D14.2 D15.2 D18.2 K1.2 K4.1 K4.5 Q11.3 R1.1 R62.2 R67.2 | length 4128.8
  Top Layer w20: K4.1@5406.26,2583.74 5485,2505 K4.5@5485,2320 ; K1.2@7210,2362.56 7255,2407.56 R1.1@7255,2474.57
  Top Layer w25: 5036.93,2808.07 D18.2@5036.93,2665 ; v4(5090,2665) D18.2@5036.93,2665 ; R62.2@5130,2590.43 5126.5,2586.93 5040,2586.93 5036.93,2590 v4(5036.93,2627.5) D18.2@5036.93,2665 ; K4.5@5485,2320 5585,2420 ; D15.2@5585,2673.07 5585,2668.07 5585,2420 ; R67.2@5654.57,2420 5585,2420
  Top Layer w150: 4880,2810 5260,2810 5320,2750 5320,2705 5406.26,2618.74 K4.1@5406.26,2583.74
  Bottom Layer w150: K4.1@5406.26,2556.22 6061.22,2556.22 6310,2805 6795,2805 6880,2720 7040,2720 7220,2540 K1.2@7220,2362.56
BATTERY: K3.2 K4.3 L13.2 | length 1636.7
  Top Layer w50: L13.2@6710,3150 6710,3327.56 K3.2@6765,3382.56
  Bottom Layer w80: K4.3@5957.44,2792.44 5957.44,3167.44 6305,3515 6632.56,3515 K3.2@6765,3382.56
  other v4: 6745,3190
BATTERY24V_IN: J10.2 Q11.4 | length 477.7
  Top Layer w150: Q11.4@4525.24,2660 4580,2605.24 J10.2@4580,2205
BIU: MD1.27 R44.1 | length 811.4
  Top Layer w15: R44.1@2610.43,6600 2765,6600 3035,6870 MD1.27@3310,6870
BTGND: C3.2 C9.2 C40.2 D19.1 F1.2 J9.1 J10.1 LED4.2 LED7.2 Q9.2 Q10.2 R4.2 R38.2 R64.1 R65.1 R69.2 R70.1 U13.3 U13.5 U13.6 | length 10493.6
  Top Layer w20: R4.2@7175,2685.43 C3.2@7255,2685.43 7324.57,2685.43 v1(7325,2685) ; v1(7570,2685) 7644.57,2685 C9.2@7645,2685.43 R38.2@7730,2685.43
  Top Layer w25: R70.1@4860,2404.57 R64.1@4860,2305.43 4805.43,2305.43 4795,2295 4795,2180 4830,2145 v4(5190,2145) ; Q10.2@5190,2340 v4(5190,2145) ; Q9.2@5325,2340 5325,2279.57 R65.1@5320.43,2275 5320.43,2215.43 ; LED7.2@5655,2192.6 5343.27,2192.6 5320.43,2215.43 ; LED4.2@7875,2192.6 7882.4,2200 v6(7960,2200) ; v4(5190,2145) 5250,2145 5320.43,2215.43
  Top Layer w40: v4(5414.17,3135) U13.3@5786.22,3135 R69.2@5980,3135 ; U13.6@5548.03,3268.86 U13.5@5786.22,3268.86
  Top Layer w100: D19.1@6160,2183.19 6328.19,2183.19 J9.1@6370,2225
  Bottom Layer w20: F1.2@6955,2335 6955,2245 7075,2125 7885,2125 v6(7960,2200)
  Bottom Layer w30: F1.2@6955,2335 7095,2195 7380,2195 7470,2285 ; v1(7325,2685) 7325,2430 7470,2285 ; v1(7570,2685) 7570,2385 7470,2285
  Bottom Layer w50: C40.2@6360,2405 6360,2235 J9.1@6370,2225
  Bottom Layer w100: F1.2@6955,2335 6955,2430 F1.2@6955,2535
  Bottom Layer w150: J10.1@4245,2205 4245,2370 4325,2450 4620,2450 ; 5080,3125 4735,3125 4620,3010 4620,2450 ; 6955,2430 6800,2430 6675,2555 6475,2555 6370,2450 J9.1@6370,2225 6310,2165 4965,2165 4855,2275 4855,2335 4740,2450 4620,2450
  other v4: 5255,2955 5414.17,2955 5555,2955 5255,3045 5414.17,3045 5555,3045 5255,3135 5555,3135 5255,3230 5414.17,3230 5555,3230 5255,3315 5414.17,3315 5555,3315
  other v6: 5740,2200
CHR_BAT_CEL1: R37.1 U7.14 | length 255
  Top Layer w15: U7.14@6278.42,6064.25 6327.83,6064.25 6370,6106.42 6370,6205.47 6374.88,6210.36 R37.1@6374.88,6250.36
DB0: LCD1.7 U7.51 U8.11 U9.2 | length 5178.3
  Top Layer w12: U9.2@4246.42,5771.25 4246.42,5712.67 4235,5701.25 4155,5701.25 v3(4137.5,5718.75) 4120,5736.25 4120,5753.27 4059,5814.27 4059,5848.23 4074.5,5863.73 4074.5,5898.96 4005,5968.46 4005,6259.04 4109.96,6364 4429,6364 4498.75,6433.75 5025,6433.75 5057,6465.75 5057,6635.78 LCD1.7@5206.1,6784.88 ; U8.11@4946.42,6136.25 4946.42,6068.58 v1(4965,6050)
  Top Layer w15: 4246.42,5712.67 4246.42,5711.25 4430.1,5527.57 4732.68,5527.57 4768.33,5563.22 4778.39,5563.22 4880.36,5461.25 5158.83,5461.25 5228.89,5391.19 5550.21,5391.19 5625.27,5466.25 5738.13,5466.25 5780.42,5508.54 U7.51@5780.42,5566.25
  Bottom Layer w12: v3(4137.5,5718.75) 4179.75,5761 4692.67,5761 4747.5,5815.83 4747.5,5832.5 v1(4965,6050)
DB1: LCD1.8 U7.50 U8.12 U9.3 | length 5083.3
  Top Layer w12: U9.3@4296.42,5771.25 4296.42,5829.83 4295,5831.25 4266.75,5831.25 4259.57,5838.43 4137.18,5838.43 4130,5831.25 v1(4100,5831.25) 4099.02,5832.23 4099.02,5867.79 4096.5,5870.3 4096.5,5902.2 4099.02,5904.71 4099.02,5905.56 4027,5977.57 4027,6249.93 4119.07,6342 4438.11,6342 4507.86,6411.75 5034.11,6411.75 5079,6456.64 5079,6626.67 5177.69,6725.36 5246.57,6725.36 LCD1.8@5283.29,6762.07 ; v1(4885,6036.25) 4896.42,6047.67 U8.12@4896.42,6136.25
  Top Layer w15: U9.3@4296.42,5771.25 4296.42,5711.25 4455.1,5552.57 4722.32,5552.57 4757.97,5588.22 4788.74,5588.22 4890.71,5486.25 5169.19,5486.25 5239.24,5416.19 5539.86,5416.19 5614.92,5491.25 5727.78,5491.25 5748.42,5511.89 U7.50@5748.42,5566.25
  Bottom Layer w12: v1(4100,5831.25) 4106.5,5824.75 4160.95,5824.75 4202.7,5783 4683.56,5783 4725.5,5824.94 4725.5,5876.75 v1(4885,6036.25)
DB2: LCD1.9 U7.49 U8.13 U9.4 | length 4959
  Top Layer w12: U9.4@4346.42,5771.25 4346.42,5819.83 4335,5831.25 4327.53,5831.25 4305.53,5853.25 4275.87,5853.25 4268.68,5860.43 4185.82,5860.43 4170,5876.25 4145,5876.25 v3(4135,5886.25) 4125,5896.25 4125,5921.24 4049,5997.24 4049,6240.81 4128.19,6320 4447.23,6320 4516.97,6389.75 5043.23,6389.75 5101,6447.52 5101,6617.56 5186.8,6703.36 5259.47,6703.36 5281.47,6725.36 5346.57,6725.36 LCD1.9@5385,6763.78 ; v1(4815,6050) 4846.42,6081.42 U8.13@4846.42,6136.25
  Top Layer w15: U9.4@4346.42,5771.25 4346.42,5711.25 4480.1,5577.57 4711.97,5577.57 4747.62,5613.22 4799.1,5613.22 4901.07,5511.25 5179.54,5511.25 5249.6,5441.19 5529.5,5441.19 5604.56,5516.25 5717.42,5516.25 U7.49@5717.42,5566.25
  Bottom Layer w12: v3(4135,5886.25) 4216.25,5805 4674.45,5805 4703.5,5834.05 4703.5,5938.5 v1(4815,6050)
DB3: LCD1.10 U7.48 U8.15 U9.5 | length 4025.7
  Top Layer w12: U9.5@4396.42,5771.25 4396.42,5816.25 4381.42,5831.25 4377.53,5831.25 4355.53,5853.25 4336.65,5853.25 4314.65,5875.25 4284.98,5875.25 4277.8,5882.43 4194.93,5882.43 4179.11,5898.25 4071,6006.35 4071,6231.7 4137.3,6298 4456.34,6298 4526.09,6367.75 5052.34,6367.75 5123,6438.41 5123,6608.44 5195.91,6681.36 5268.59,6681.36 5290.59,6703.36 5355.69,6703.36 5377.69,6725.36 5446.57,6725.36 LCD1.10@5480,6758.78
  Top Layer w15: U9.5@4396.42,5771.25 4396.42,5721.25 4515.1,5602.57 4701.61,5602.57 U8.15@4796.42,5697.38 ; U8.15@4796.42,5703.18 U8.15@4796.42,5697.38 ; U7.48@5626.42,5656.25 5587.98,5617.8 5587.98,5535.02 5519.15,5466.19 5259.96,5466.19 5189.9,5536.25 4911.42,5536.25 4796.42,5651.25 U8.15@4796.42,5697.38
DB4: LCD1.11 U7.47 U8.16 U9.6 | length 4221.8
  Top Layer w12: 4188.22,5920.25 4093,6015.46 4093,6222.59 4146.41,6276 4465.45,6276 4535.2,6345.75 5061.45,6345.75 5145,6429.3 5145,6599.33 5205.03,6659.36 5277.7,6659.36 5299.7,6681.36 5364.8,6681.36 5386.8,6703.36 5455.69,6703.36 5477.69,6725.36 5546.57,6725.36 LCD1.11@5606.1,6784.88 ; 4188.23,5920.25 4204.04,5904.43 4286.91,5904.43 4294.09,5897.25 4323.76,5897.25 4345.76,5875.25 4364.65,5875.25 4386.65,5853.25 4405.53,5853.25 4418.42,5840.36 4418.42,5839.25 4446.42,5811.25 U9.6@4446.42,5771.25
  Top Layer w15: U9.6@4446.42,5771.25 4446.42,5711.25 4530.1,5627.57 4691.26,5627.57 4754.67,5690.98 4754.67,5736.01 4784.91,5766.25 4836.42,5766.25 4846.42,5756.25 U8.16@4846.42,5703.18 4846.42,5651.25 4936.42,5561.25 5200.25,5561.25 5270.31,5491.19 5508.79,5491.19 5562.98,5545.38 5562.98,5673.8 5576.42,5687.25 U7.47@5626.42,5687.25
DB5: LCD1.12 U7.46 U8.17 U9.7 | length 4259.2
  Top Layer w12: U9.7@4496.42,5771.25 4496.42,5812.36 4455.53,5853.25 4436.65,5853.25 4414.65,5875.25 4395.76,5875.25 4373.76,5897.25 4354.87,5897.25 4332.87,5919.25 4303.2,5919.25 4296.02,5926.43 4213.16,5926.43 4197.34,5942.25 4191,5948.58 4190.84,5948.75 4115,6024.58 4115,6213.47 4155.53,6254 4474.56,6254 4544.31,6323.75 5070.56,6323.75 5167,6420.19 5167,6590.22 5214.14,6637.36 5286.81,6637.36 5308.81,6659.36 5373.91,6659.36 5395.91,6681.36 5464.8,6681.36 5486.8,6703.36 5555.69,6703.36 5577.69,6725.36 5646.57,6725.36 LCD1.12@5706.1,6784.88
  Top Layer w15: U9.7@4496.42,5771.25 4496.42,5711.25 4555.1,5652.57 4680.9,5652.57 4729.67,5701.33 4729.67,5746.36 4774.56,5791.25 4861.42,5791.25 4896.42,5756.25 U8.17@4896.42,5703.18 4896.42,5651.25 4961.42,5586.25 5210.61,5586.25 5280.67,5516.19 5498.44,5516.19 5537.98,5555.73 5537.98,5684.16 5572.07,5718.25 U7.46@5626.42,5718.25
DB6: LCD1.13 U7.45 U8.18 U9.8 | length 4297.1
  Top Layer w12: U9.8@4546.42,5771.25 4546.42,5812.36 4505.53,5853.25 4486.65,5853.25 4464.65,5875.25 4445.76,5875.25 4423.76,5897.25 4404.87,5897.25 4382.87,5919.25 4363.98,5919.25 4341.98,5941.25 4312.32,5941.25 4305.13,5948.43 4222.27,5948.43 4199.95,5970.75 4137,6033.69 4137,6204.36 4164.64,6232 4483.68,6232 4553.43,6301.75 5079.68,6301.75 5189,6411.07 5189,6580.47 5201.25,6592.72 5201.25,6593.36 5223.25,6615.36 5295.92,6615.36 5317.92,6637.36 5383.03,6637.36 5405.03,6659.36 5473.91,6659.36 5495.91,6681.36 5564.8,6681.36 5586.8,6703.36 5655.69,6703.36 5676.34,6724.01 5745.23,6724.01 LCD1.13@5806.1,6784.88
  Top Layer w15: U9.8@4546.42,5771.25 4546.42,5711.25 4580.1,5677.57 4670.55,5677.57 4704.67,5711.69 4704.67,5756.72 4764.2,5816.25 4886.42,5816.25 4946.42,5756.25 U8.18@4946.42,5703.18 4946.42,5651.25 4986.42,5611.25 5220.96,5611.25 5291.02,5541.19 5488.08,5541.19 5512.98,5566.09 5512.98,5694.52 5568.71,5750.25 U7.45@5626.42,5750.25
DB7: LCD1.14 U7.44 U8.19 U9.9 | length 4334.2
  Top Layer w12: U9.9@4596.42,5771.25 4596.42,5812.36 4555.53,5853.25 4536.65,5853.25 4514.65,5875.25 4495.76,5875.25 4473.76,5897.25 4454.87,5897.25 4432.87,5919.25 4413.98,5919.25 4391.98,5941.25 4373.1,5941.25 4351.1,5963.25 4321.43,5963.25 4314.25,5970.43 4231.38,5970.43 4209.06,5992.75 4159,6042.8 4159,6195.25 4173.75,6210 4492.79,6210 4562.54,6279.75 5088.79,6279.75 5211,6401.96 5211,6571.36 5233,6593.36 5305.04,6593.36 5327.04,6615.36 5392.14,6615.36 5414.14,6637.36 5483.03,6637.36 5505.03,6659.36 5578,6659.36 5600,6681.36 5664.8,6681.36 5685.46,6702.01 5754.34,6702.01 5777.69,6725.36 5846.57,6725.36 LCD1.14@5906.1,6784.88
  Top Layer w15: U9.9@4596.42,5771.25 4596.42,5711.25 4605.1,5702.57 4660.19,5702.57 4679.67,5722.05 4679.67,5767.07 4753.85,5841.25 4911.42,5841.25 4996.42,5756.25 U8.19@4996.42,5703.18 4996.42,5651.25 5011.42,5636.25 5231.32,5636.25 5301.38,5566.19 5477.73,5566.19 5487.98,5576.44 5487.98,5704.87 5564.36,5781.25 U7.44@5626.42,5781.25
DE/RE: U2.2 U2.3 U7.5 | length 3294
  Top Layer w15: U7.5@6278.42,5781.25 6414.11,5781.25 6435,5760.36 6435,5700 6463.09,5671.91 6567.27,5671.91 6590.36,5695 6689.64,5695 6705,5710.36 6705,5783.79 6740,5818.79 6740,5853.99 6745.06,5859.05 6745.06,5945.06 6817.86,6017.86 7311.79,6017.86 7344.64,5985 7435,5985 7460.75,6010.75 7461.5,6010 7508.5,6010 7535,6036.5 7535,6059.29 7590,6114.29 7590,6245 7635,6290 8070,6290 8280.36,6079.64 8354.64,6079.64 8404.29,6030 8540,6030 8555,6015 8555,5895 8570,5880 8635,5880 8650,5895 U2.2@8650,5952.64 U2.3@8700,5952.64
E: LCD1.6 U5.4 | length 897.8
  Top Layer w15: U5.4@5555,6552.36 5555,6625 5690,6625 v1(5710,6645)
  Bottom Layer w15: LCD1.6@5106.1,6784.88 5185.99,6705 5650,6705 v1(5710,6645)
FG: U11.1